# Altium PCB PCB_RLC_LPF.PcbDoc
Units mm, origin at the board's own origin, x right, y up, seen from the top; angles counter-clockwise.
Board outline 180 x 65 mm, 2 copper layers (Top Layer, Bottom Layer); 100 components, 61 nets, 200 pads, 42 vias.
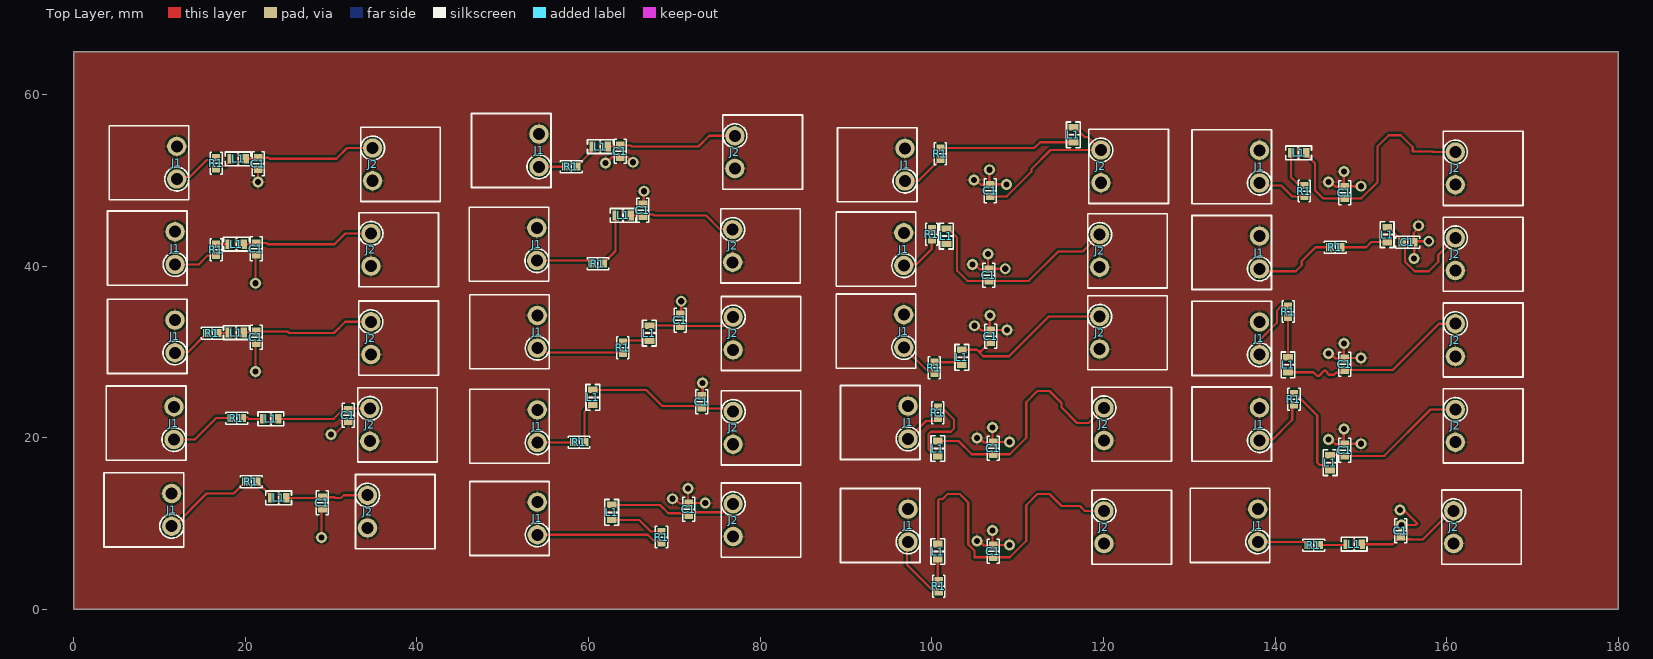
[diagram p0: Top Layer view]
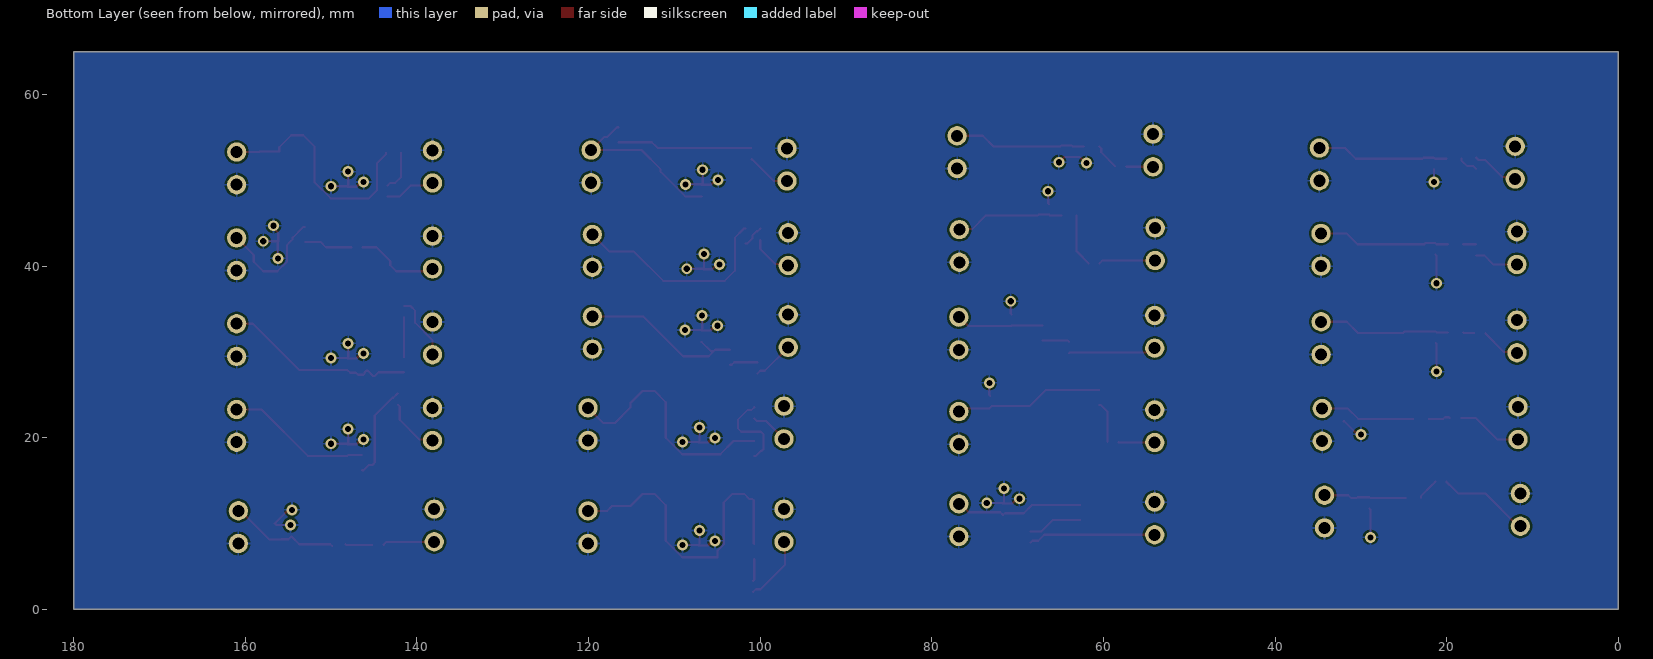
[diagram p1: Bottom Layer view, seen from below]
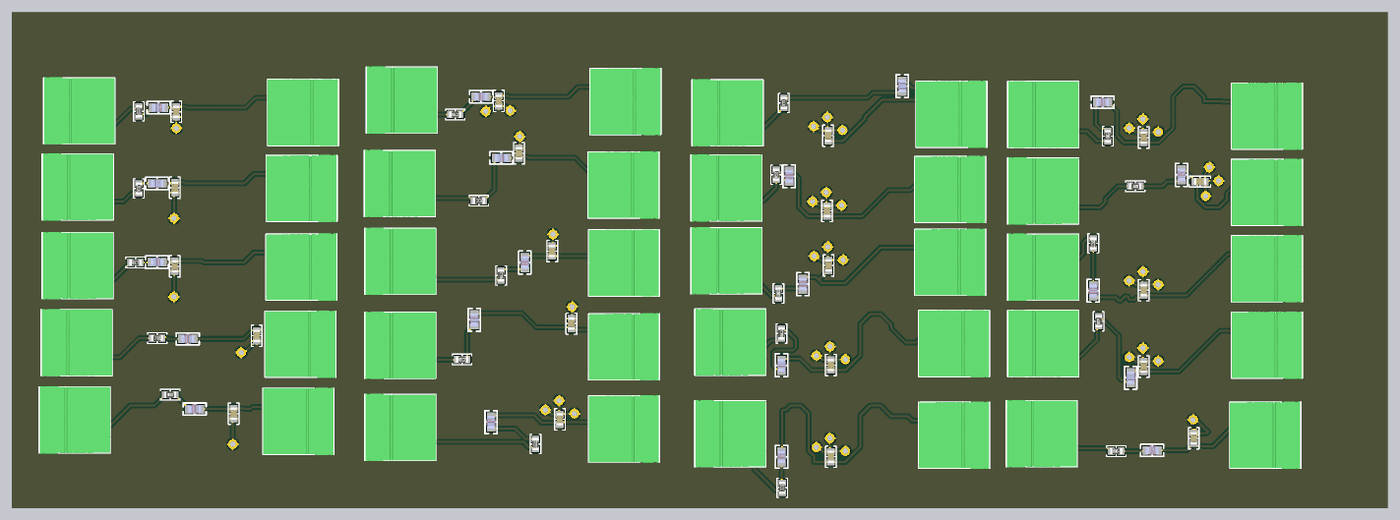
[diagram p2: 3D render of the assembled board from above, using the file's embedded part models]

## Layer stack, top to bottom
Top Solder: solder mask 0.0102, Solder Resist, Dk 3.5
Top Layer: signal copper 0.0356
Dielectric 1: dielectric 0.32, FR-4, Dk 4.8
Bottom Layer: signal copper 0.0356
Bottom Solder: solder mask 0.0102, Solder Resist, Dk 3.5

## Board outline
0,0 180,0 180,65 0,65

## Design rules (kind name [scope] priority, off if disabled: settings)
Clearance [All] p1: gap=0.254 ignorepadtopadclearanceinfootprint=FALSE except(0: Arc-Hole Track-Hole SMDPad-Hole THPad-Hole Via-Hole Fill-Hole Poly-Hole Region-Hole Text-Hole)
PolygonConnect [All] p1: connectstyle=Relief reliefconductorwidth=0.254 reliefentries=4 polygonreliefangle="90 Angle" airgapwidth=0.254
RoutingVias [All] p1: holewidth=0.711 width=1.27 viastyle="Through Hole" minholewidth=0.711 minwidth=1.27 maxholewidth=0.711 maxwidth=1.27
SolderMaskExpansion [All] p1: expansion=0.102 istentingtop=FALSE
Width [All] p1: maxlimit=0.254 minlimit=0.254 preferedwidth=0.254
30 further rules are at their usual default settings.

## Classes and differential pairs
channel class PCB_RLC_LPF: Filter1 Filter2 Filter3 Filter4 Filter5 Filter6 Filter7 Filter8 Filter9 Filter10 Filter11 Filter12 Filter13 Filter14 Filter15 Filter16 Filter17 Filter18 Filter19 Filter20
component class Filter18: C1_Filter18 J1_Filter18
component class Filter16: C1_Filter16 J1_Filter16
component class Filter15: J1_Filter15
component class Filter14: C1_Filter14
component class Filter13: J1_Filter13
component class Filter12: J1_Filter12
component class Filter11: C1_Filter11
component class Filter10: C1_Filter10 J1_Filter10 J2_Filter10
component class Filter9: C1_Filter9 J1_Filter9
component class Filter7: C1_Filter7
component class Filter6: C1_Filter6 J2_Filter6
component class Filter4: J2_Filter4
component class Filter2: C1_Filter2 J1_Filter2

## Components (designator, comment, footprint, x,y, rotation, side; value= is the part's Value field where it differs from the comment)
C1 "" "CAP 0603_1608" 21.5,51.95 r90 top value="10 µF"
C1 "" "CAP 0603_1608" 21.305,42.002 r90 top value="10 µF"
C1 "" "CAP 0603_1608" 21.293,31.706 r90 top value="10 µF"
C1 "" "CAP 0603_1608" 32,22.6 r90 top value="10 µF"
C1 "" "CAP 0603_1608" 29.005,12.402 r90 top value="10 µF"
C1 "" "CAP 0603_1608" 63.705,53.375 r90 top value="10 µF"
C1 "" "CAP 0603_1608" 66.345,46.517 r270 top value="10 µF"
C1 "" "CAP 0603_1608" 70.7,33.7 r270 top value="10 µF"
C1 "" "CAP 0603_1608" 73.2,24.2 r270 top value="10 µF"
C1 "" "CAP 0603_1608" 71.7,11.667 r270 top value="10 µF"
C1 "" "CAP 0603_1608" 106.8,48.8 r270 top value="10 µF"
C1 "" "CAP 0603_1608" 106.658,38.958 r270 top value="10 µF"
C1 "" "CAP 0603_1608" 106.858,31.816 r270 top value="10 µF"
C1 "" "CAP 0603_1608" 107.158,18.764 r270 top value="10 µF"
C1 "" "CAP 0603_1608" 107.158,6.764 r270 top value="10 µF"
C1 "" "CAP 0603_1608" 148.1,48.569 r270 top value="10 µF"
C1 "" "CAP 0603_1608" 155.469,42.8 r180 top value="10 µF"
C1 "" "CAP 0603_1608" 148.1,28.569 r270 top value="10 µF"
C1 "" "CAP 0603_1608" 148.1,18.569 r270 top value="10 µF"
C1 "" "CAP 0603_1608" 154.65,9.175 r270 top value="10 µF"
J1 "" "FCI 06-381-2PIN" 8.726,52.049 r90 top
J1 "" "FCI 06-381-2PIN" 8.531,42.101 r90 top
J1 "" "FCI 06-381-2PIN" 8.519,31.805 r90 top
J1 "" "FCI 06-381-2PIN" 8.394,21.705 r90 top
J1 "" "FCI 06-381-2PIN" 8.131,11.601 r90 top
J1 "" "FCI 06-381-2PIN" 50.931,53.474 r90 top
J1 "" "FCI 06-381-2PIN" 50.676,42.549 r90 top
J1 "" "FCI 06-381-2PIN" 50.731,32.349 r90 top
J1 "" "FCI 06-381-2PIN" 50.731,21.349 r90 top
J1 "" "FCI 06-381-2PIN" 50.731,10.599 r90 top
J1 "" "FCI 06-381-2PIN" 93.573,51.816 r90 top
J1 "" "FCI 06-381-2PIN" 93.431,41.974 r90 top
J1 "" "FCI 06-381-2PIN" 93.431,32.432 r90 top
J1 "" "FCI 06-381-2PIN" 93.931,21.78 r90 top
J1 "" "FCI 06-381-2PIN" 93.931,9.78 r90 top
J1 "" "FCI 06-381-2PIN" 134.873,51.585 r90 top
J1 "" "FCI 06-381-2PIN" 134.873,41.585 r90 top
J1 "" "FCI 06-381-2PIN" 134.873,31.585 r90 top
J1 "" "FCI 06-381-2PIN" 134.873,21.585 r90 top
J1 "" "FCI 06-381-2PIN" 134.673,9.785 r90 top
J2 "" "FCI 06-381-2PIN" 38.15,51.85 r270 top
J2 "" "FCI 06-381-2PIN" 37.955,41.902 r270 top
J2 "" "FCI 06-381-2PIN" 37.943,31.606 r270 top
J2 "" "FCI 06-381-2PIN" 37.818,21.506 r270 top
J2 "" "FCI 06-381-2PIN" 37.555,11.402 r270 top
J2 "" "FCI 06-381-2PIN" 80.355,53.275 r270 top
J2 "" "FCI 06-381-2PIN" 80.1,42.35 r270 top
J2 "" "FCI 06-381-2PIN" 80.155,32.15 r270 top
J2 "" "FCI 06-381-2PIN" 80.155,21.15 r270 top
J2 "" "FCI 06-381-2PIN" 80.155,10.4 r270 top
J2 "" "FCI 06-381-2PIN" 122.997,51.617 r270 top
J2 "" "FCI 06-381-2PIN" 122.855,41.775 r270 top
J2 "" "FCI 06-381-2PIN" 122.855,32.233 r270 top
J2 "" "FCI 06-381-2PIN" 123.355,21.581 r270 top
J2 "" "FCI 06-381-2PIN" 123.355,9.581 r270 top
J2 "" "FCI 06-381-2PIN" 164.297,51.386 r270 top
J2 "" "FCI 06-381-2PIN" 164.297,41.386 r270 top
J2 "" "FCI 06-381-2PIN" 164.297,31.386 r270 top
J2 "" "FCI 06-381-2PIN" 164.297,21.386 r270 top
J2 "" "FCI 06-381-2PIN" 164.097,9.586 r270 top
L1 "" "IND 0603_1608 RF WW" 19.175,52.5 r180 top value=47µH
L1 "" "IND 0603_1608 RF WW" 18.98,42.552 r180 top value=47µH
L1 "" "IND 0603_1608 RF WW" 18.968,32.256 r180 top value=47µH
L1 "" "IND 0603_1608 RF WW" 23,22.2 r180 top value=47µH
L1 "" "IND 0603_1608 RF WW" 23.9,13 r180 top value=47µH
L1 "" "IND 0603_1608 RF WW" 61.38,53.925 r180 top value=47µH
L1 "" "IND 0603_1608 RF WW" 64.025,45.9 r180 top value=47µH
L1 "" "IND 0603_1608 RF WW" 67.1,32.2 r270 top value=47µH
L1 "" "IND 0603_1608 RF WW" 60.5,24.7 r270 top value=47µH
L1 "" "IND 0603_1608 RF WW" 62.7,11.3 r270 top value=47µH
L1 "" "IND 0603_1608 RF WW" 116.5,55.3 r270 top value=47µH
L1 "" "IND 0603_1608 RF WW" 101.7,43.5 r270 top value=47µH
L1 "" "IND 0603_1608 RF WW" 103.5,29.375 r270 top value=47µH
L1 "" "IND 0603_1608 RF WW" 100.7,18.748 r270 top value=47µH
L1 "" "IND 0603_1608 RF WW" 100.7,6.748 r270 top value=47µH
L1 "" "IND 0603_1608 RF WW" 142.725,53.2 r180 top value=47µH
L1 "" "IND 0603_1608 RF WW" 153.047,43.675 r270 top value=47µH
L1 "" "IND 0603_1608 RF WW" 141.5,28.5 r90 top value=47µH
L1 "" "IND 0603_1608 RF WW" 146.4,17.1 r270 top value=47µH
L1 "" "IND 0603_1608 RF WW" 149.2,7.6 r180 top value=47µH
R1 "" "RES 0603_1608" 144.5,7.5 r0 top value="560 Ohms"
R1 "" "RES 0603_1608" 142.196,24.503 r90 top value="560 Ohms"
R1 "" "RES 0603_1608" 141.5,34.7 r270 top value="560 Ohms"
R1 "" "RES 0603_1608" 147,42.2 r0 top value="560 Ohms"
R1 "" "RES 0603_1608" 143.4,48.75 r90 top value="560 Ohms"
R1 "" "RES 0603_1608" 100.8,2.7 r90 top value="560 Ohms"
R1 "" "RES 0603_1608" 100.7,22.9 r90 top value="560 Ohms"
R1 "" "RES 0603_1608" 100.3,28.15 r90 top value="560 Ohms"
R1 "" "RES 0603_1608" 100,43.7 r90 top value="560 Ohms"
R1 "" "RES 0603_1608" 101,53.1 r90 top value="560 Ohms"
R1 "" "RES 0603_1608" 68.504,8.43 r90 top value="560 Ohms"
R1 "" "RES 0603_1608" 58.9,19.5 r0 top value="560 Ohms"
R1 "" "RES 0603_1608" 64,30.5 r90 top value="560 Ohms"
R1 "" "RES 0603_1608" 61.1,40.3 r0 top value="560 Ohms"
R1 "" "RES 0603_1608" 58,51.6 r0 top value="560 Ohms"
R1 "" "RES 0603_1608" 20.7,14.9 r0 top value="560 Ohms"
R1 "" "RES 0603_1608" 19,22.3 r0 top value="560 Ohms"
R1 "" "RES 0603_1608" 16.15,32.2 r0 top value="560 Ohms"
R1 "" "RES 0603_1608" 16.6,41.9 r90 top value="560 Ohms"
R1 "" "RES 0603_1608" 16.6,52 r270 top value="560 Ohms"

## Footprints (in the part's own frame and the unit in brackets; to place one, negate y for a bottom-side part, rotate by r counter-clockwise, add the part's x,y. Pads: shape width x height; smd on the part's side, far side on the other; paste and mask are expansions set on the pad)
"CAP 0603_1608" [mm] "Chip Capacitor, 2-Leads, Body 1.60x0.80mm, IPC Medium Density"
  rect 0.9x1 smd: 1(-0.675,0) 2(0.675,0)
  silkscreen extent -1.4,-0.7 1.4,0.7, body extent -0.8,-0.41 0.8,0.41, height 0.82
"FCI 06-381-2PIN" [mm] "FCI Pluggable Terminal Block"
  round 2.25 hole 1.4: 1(-1.905,-3.302) 2(1.905,-3.302)
  silkscreen extent -4.32,-4.7 4.32,4.57, body extent -4.4,-4.7 4.4,4.5, height 7.6
"IND 0603_1608 RF WW" [mm] "Chip Inductor, 2-Leads, Body 1.65x0.99mm, IPC Medium Density"
  rect 0.76x1.13 smd: 1(-0.875,0) 2(0.875,0)
  silkscreen extent -1.5,-0.8 1.5,0.8, body extent -0.84,-0.58 0.83,0.58, height 1
"RES 0603_1608" [mm] "Chip Resistor, 2-Leads, Body 1.60x0.80mm, IPC Medium Density"
  rect 0.85x0.95 smd: 1(-0.65,0) 2(0.65,0)
  silkscreen extent -1.27,-0.7 1.27,0.7, body extent -0.8,-0.4 0.8,0.4, height 0.45

## Part data
C1 C1 C1 C1 C1 C1 C1 C1 C1 C1 C1 C1 C1 C1 C1 C1 C1 C1 C1 C1: library part MD0603BW106M100NHT-EM, "CAP CER 10UF 10V X5R 0603", Capacitance="10 µF", Device Package="0603 (1608 Metric)", manufacturer="Knowles Novacap", Operating Temperature="-55°C ~ 85°C", Supplier Part Number 1=1763-MD0603BW106M100NHT-EMCT-ND, Temperature Coefficient=X5R, Tolerance=±20%, Voltage - Rated=10V, Applications="Medical, Non-Critical", componentlink1description=Datasheet, componentlink1url="https://mm.digikey.com/Volume0/opasdata/d220001/medias/docus/5546/MD Series R3.pdf", componentlink2description="DigiKey Link", componentlink2url=https://www.digikey.com/en/products/detail/knowles-novacap/MD0603BW106M100NHT-EM/21406876, lastupdated="02/11/2023 19:09:18", Lifecycle Status=Active, Minimum Order=1, Mounting Type="Surface Mount, MLCC", Package / Case="0603 (1608 Metric)", packaging=TapeAndReel, Part Number=MD0603BW106M100NHT-EM, partid=56748, price=0.24, series=MD, Supplier 1=DigiKey
J1 J1 J1 J1 J1 J1 J1 J1 J1 J1 J1 J1 J1 J1 J1 J1 J1 J1 J1 J1 J2 J2 J2 J2 J2 J2 J2 J2 J2 J2 J2 J2 J2 J2 J2 J2 J2 J2 J2 J2: library part OQ0232510000G, "TERM BLOCK HDR 2POS 90DEG 3.81MM", Color=Green, Current - UL=10A, manufacturer="Amphenol Anytek", Operating Temperature="-40°C ~ 115°C", Supplier Part Number 1=609-3819-ND, Voltage - UL=300V, componentlink1description=Datasheet, componentlink1url=http://portal.fciconnect.com/Comergent//fci/drawing/oqxx32x100j0g.pdf, componentlink2description="DigiKey Link", componentlink2url=//digikey.com/product-detail/en/amphenol-anytek/OQ0232510000G/609-3819-ND/2261255, Contact Mating Finish=Tin, Header Orientation="90°, Right Angle", lastupdated="16/12/2019 19:14:30", Lifecycle Status=0, Minimum Order=1, Mounting Type="Through Hole", Number of Levels=1, Number of Positions=2, packaging=Bulk, Part Number=OQ0232510000G, Part Status=Active, Pitch="0.150\" (3.81mm)", Positions Per Level=2, price=0.49, series=06-381, Supplier 1=DigiKey, Termination Style=Solder, Type="Header, Male Pins, Shrouded (4 Side)"
L1 L1 L1 L1 L1 L1 L1 L1 L1 L1 L1 L1 L1 L1 L1 L1 L1 L1 L1 L1: library part L0603B470MPWFT, "INDUCTORPOWER LINE 0603 47H 20%", Current Rating (Amps)=90mA, DC Resistance (DCR)=5.8Ohm, Device Package="0603 (1608 Metric)", Frequency - Self Resonant=11MHz, Inductance=47µH, Inductance Frequency - Test=2.52MHz, manufacturer=KEMET, Operating Temperature="-40°C ~ 105°C", Supplier Part Number 1=399-17776-1-ND, Tolerance=±20%, componentlink1description=Datasheet, componentlink1url=https://api.kemet.com/component-edge/download/datasheet/L0603B470MPWFT.pdf, componentlink2description="DigiKey Link", componentlink2url=http://digikey.com/product-detail/en/kemet/L0603B470MPWFT/399-17776-1-ND/8601439, Height - Seated (Max)="0.035\" (0.90mm)", lastupdated="06/09/2020 11:05:20", Lifecycle Status=Active, Material - Core=Ferrite, Minimum Order=1, Mounting Type="Surface Mount", Package / Case="0603 (1608 Metric)", packaging=TapeAndReel, Part Number=L0603B470MPWFT, Part Status=Active, partid=1309, price=0.14, series=L-PWF, Shielding=Unshielded, Size / Dimension="0.063\" L x 0.031\" W (1.60mm x 0.80mm)", Supplier 1=DigiKey, Supplier Device Package="0603 (1608 Metric)", Type=Wirewound
R1 R1 R1 R1 R1 R1 R1 R1 R1 R1 R1 R1 R1 R1 R1 R1 R1 R1 R1 R1: library part CRGP0603F560R, "RES 560 OHM 1% 1/4W 0603", Device Package="0603 (1608 Metric)", manufacturer="TE Connectivity Passive Product", Operating Temperature="-55°C ~ 155°C", Power (Watts)="0.25W, 1/4W", Resistance="560 Ohms", Supplier Device Package=0603, Supplier Part Number 1=A130413CT-ND, Temperature Coefficient=±100ppm/°C, Tolerance=±1%, componentlink1description=Datasheet, componentlink1url=https://www.te.com/commerce/DocumentDelivery/DDEController?Action=srchrtrv&DocNm=9-1773463-9&DocType=DS&DocLang=English, componentlink2description="DigiKey Link", componentlink2url=https://www.digikey.com/en/products/detail/te-connectivity-passive-product/CRGP0603F560R/8577015, Composition="Thick Film", Features="Pulse Withstanding", Height - Seated (Max)="0.022\" (0.55mm)", lastupdated="02/11/2023 19:45:35", Lifecycle Status=Active, Minimum Order=1, Number of Terminations=2, Package / Case="0603 (1608 Metric)", packaging=TapeAndReel, Part Number=CRGP0603F560R, Part Status=Active, partid=4997, price=0.02, series=CRGP, Size / Dimension="0.063\" L x 0.031\" W (1.60mm x 0.80mm)", Supplier 1=DigiKey

## Via types
v1: diameter 1.27, hole 0.711, Top Layer to Bottom Layer, 42 vias

## Nets (pads, with @x,y where several pads share a name; then routed paths per layer and width w, separated by ;. In a path a pad name is that pad's centre, name@x,y a point inside that pad or via, vN(x,y) a via of type N, cw(c..) or ccw(c..) an arc to the next point about the centre after c; other vN are vias at no path point)
GND: C1.1 J1.2 J2.2 | length 86.6
  Top Layer w0.254: v1(21.188,27.704) 21.188,30.926 C1.1@21.293,31.031 ; v1(21.2,38) 21.2,41.222 C1.1@21.305,41.327 ; v1(21.5,49.8) C1.1@21.5,51.275 ; v1(28.9,8.4) 28.9,11.622 C1.1@29.005,11.727 ; v1(30,20.4) 30.194,20.594 30.619,20.594 31.95,21.925 C1.1@32,21.925 ; v1(62,52) 62.037,52 62.737,52.7 63.705,52.7 64.586,52.7 65.186,52.1 v1(65.2,52.1) ; C1.1@66.345,47.192 66.445,47.292 v1(66.445,48.717) ; v1(69.8,12.898) 70.075,12.898 70.631,12.342 C1.1@71.7,12.342 ; C1.1@70.7,34.375 70.8,34.475 v1(70.8,35.9) ; v1(71.6,14.098) 71.6,12.442 C1.1@71.7,12.342 ; C1.1@73.2,24.875 73.3,24.975 v1(73.3,26.4) ; v1(73.6,12.398) 71.756,12.398 C1.1@71.7,12.342 ; v1(104.758,40.189) 105.033,40.189 105.589,39.633 C1.1@106.658,39.633 ; v1(104.9,50.031) 105.175,50.031 105.731,49.475 C1.1@106.8,49.475 ; v1(104.958,33.047) 105.233,33.047 105.789,32.491 C1.1@106.858,32.491 ; v1(105.258,7.995) 105.533,7.995 106.089,7.439 C1.1@107.158,7.439 ; v1(105.258,19.995) 105.533,19.995 106.089,19.439 C1.1@107.158,19.439 ; C1.1@106.558,39.633 C1.1@106.658,39.633 ; v1(106.558,41.389) 106.558,39.733 C1.1@106.658,39.633 ; C1.1@106.7,49.475 C1.1@106.8,49.475 ; v1(106.7,51.231) 106.7,49.575 C1.1@106.8,49.475 ; C1.1@106.758,32.491 C1.1@106.858,32.491 ; v1(106.758,34.247) 106.758,32.591 C1.1@106.858,32.491 ; C1.1@107.058,7.439 C1.1@107.158,7.439 ; v1(107.058,9.195) 107.058,7.539 C1.1@107.158,7.439 ; C1.1@107.058,19.439 C1.1@107.158,19.439 ; v1(107.058,21.195) 107.058,19.539 C1.1@107.158,19.439 ; v1(108.558,39.689) 106.714,39.689 C1.1@106.658,39.633 ; v1(108.7,49.531) 106.856,49.531 C1.1@106.8,49.475 ; v1(108.758,32.547) 106.914,32.547 C1.1@106.858,32.491 ; v1(109.058,7.495) 107.214,7.495 C1.1@107.158,7.439 ; v1(109.058,19.495) 107.214,19.495 C1.1@107.158,19.439 ; v1(146.2,19.8) 146.475,19.8 147.031,19.244 C1.1@148.1,19.244 ; v1(146.2,29.8) 146.475,29.8 147.031,29.244 C1.1@148.1,29.244 ; v1(146.2,49.8) 146.475,49.8 147.031,49.244 C1.1@148.1,49.244 ; C1.1@148,19.244 C1.1@148.1,19.244 ; v1(148,21) 148,19.344 C1.1@148.1,19.244 ; C1.1@148,29.244 C1.1@148.1,29.244 ; v1(148,31) 148,29.344 C1.1@148.1,29.244 ; C1.1@148,49.244 C1.1@148.1,49.244 ; v1(148,51) 148,49.344 C1.1@148.1,49.244 ; v1(150,19.3) 148.156,19.3 C1.1@148.1,19.244 ; v1(150,29.3) 148.156,29.3 C1.1@148.1,29.244 ; v1(150,49.3) 148.156,49.3 C1.1@148.1,49.244 ; v1(154.55,11.606) 154.744,11.412 155.15,11.412 156.549,10.013 156.375,9.839 v1(154.731,9.839) ; C1.1@156.144,42.9 C1.1@156.144,42.8 ; v1(156.2,40.9) 156.2,42.744 C1.1@156.144,42.8 ; v1(156.7,44.7) 156.7,44.425 156.144,43.869 C1.1@156.144,42.8 ; v1(157.9,42.9) 156.244,42.9 C1.1@156.144,42.8
IN_Filter1: J1.1@12.028,50.144 R1.1@16.6,52.65 | length 5.6
  Top Layer w0.254: J1.1@12.028,50.144 12.256,50.372 13.534,50.372 15.514,52.352 16.302,52.352 R1.1@16.6,52.65
IN_Filter2: J1.1@11.833,40.196 R1.1@16.6,41.25 | length 5.2
  Top Layer w0.254: J1.1@11.833,40.196 14.596,40.196 15.65,41.25 R1.1@16.6,41.25
IN_Filter3: J1.1@11.821,29.9 R1.1@15.5,32.2 | length 4.7
  Top Layer w0.254: J1.1@11.821,29.9 11.898,29.977 13.327,29.977 15.5,32.15 R1.1@15.5,32.2
IN_Filter4: J1.1@11.696,19.8 R1.1@18.35,22.3 | length 7.7
  Top Layer w0.254: J1.1@11.696,19.8 14.125,19.8 16.625,22.3 R1.1@18.35,22.3
IN_Filter5: J1.1@11.433,9.696 R1.1@20.05,14.9 | length 10.8
  Top Layer w0.254: J1.1@11.433,9.696 11.696,9.696 15.5,13.5 18.65,13.5 19.702,14.552 19.752,14.552 20.05,14.85 R1.1@20.05,14.9
IN_Filter6: J1.1@54.233,51.569 R1.1@57.35,51.6 | length 3.1
  Top Layer w0.254: J1.1@54.233,51.569 57.319,51.569 R1.1@57.35,51.6
IN_Filter7: J1.1@53.978,40.644 R1.1@60.45,40.3 | length 6.6
  Top Layer w0.254: J1.1@53.978,40.644 60.152,40.644 60.45,40.346 R1.1@60.45,40.3
IN_Filter8: J1.1@54.033,30.444 R1.1@64,29.85 | length 10.2
  Top Layer w0.254: J1.1@54.033,30.444 54.573,30.444 55.081,29.936 63.914,29.936 R1.1@64,29.85
IN_Filter9: J1.1@54.033,19.444 R1.1@58.25,19.5 | length 4.2
  Top Layer w0.254: J1.1@54.033,19.444 58.194,19.444 R1.1@58.25,19.5
IN_Filter10: J1.1@54.033,8.694 R1.1@68.504,7.78 | length 14.9
  Top Layer w0.254: J1.1@54.033,8.694 66.906,8.694 67.6,8 68.284,8 R1.1@68.504,7.78
IN_Filter11: J1.1@96.875,49.911 R1.1@101,52.45 | length 5.2
  Top Layer w0.254: J1.1@96.875,49.911 98.411,49.911 100.95,52.45 R1.1@101,52.45
IN_Filter12: J1.1@96.733,40.069 R1.1@100,43.05 | length 5.1
  Top Layer w0.254: J1.1@96.733,40.069 96.903,40.239 98.239,40.239 100,42 R1.1@100,43.05
IN_Filter13: J1.1@96.733,30.527 R1.1@100.3,27.5 | length 4.8
  Top Layer w0.254: J1.1@96.733,30.527 99.462,27.798 100.002,27.798 R1.1@100.3,27.5
IN_Filter14: J1.1@97.233,19.875 R1.1@100.7,22.25 | length 4.5
  Top Layer w0.254: J1.1@97.233,19.875 99.31,21.952 100.402,21.952 R1.1@100.7,22.25
IN_Filter15: J1.1@97.233,7.875 R1.1@100.8,2.05 | length 7.7
  Top Layer w0.254: J1.1@97.233,7.875 97.1,7.742 97.1,5.2 99.952,2.348 100.502,2.348 R1.1@100.8,2.05
IN_Filter16: J1.1@138.175,49.68 R1.1@143.4,48.1 | length 5.9
  Top Layer w0.254: J1.1@138.175,49.68 138.455,49.4 140.7,49.4 142,48.1 R1.1@143.4,48.1
IN_Filter17: J1.1@138.175,39.68 R1.1@146.35,42.2 | length 9.7
  Top Layer w0.254: J1.1@138.175,39.68 138.455,39.4 142.4,39.4 143.1,40.1 143.1,40.6 144.7,42.2 R1.1@146.35,42.2
IN_Filter18: J1.1@138.175,29.68 R1.1@141.5,35.35 | length 7.5
  Top Layer w0.254: J1.1@138.175,29.68 138.175,31.36 140.2,33.385 140.2,34.8 140.75,35.35 R1.1@141.5,35.35
IN_Filter19: J1.1@138.175,19.68 R1.1@142.196,23.853 | length 6.7
  Top Layer w0.254: J1.1@138.175,19.68 138.276,19.781 139.681,19.781 142,22.1 142,23.657 R1.1@142.196,23.853
IN_Filter20: J1.1@137.975,7.88 R1.1@143.85,7.5 | length 6.1
  Top Layer w0.254: J1.1@137.975,7.88 138.007,7.848 143.552,7.848 143.85,7.55 R1.1@143.85,7.5
NetL1_Filter1_2: L1.2@18.3,52.5 R1.2@16.6,51.35 | length 2.3
  Top Layer w0.254: R1.2@16.6,51.35 16.898,51.648 17.633,51.648 18.3,52.315 L1.2@18.3,52.5
NetL1_Filter2_2: L1.2@18.105,42.552 R1.2@16.6,42.55 | length 1.5
  Top Layer w0.254: R1.2@16.6,42.55 16.602,42.552 L1.2@18.105,42.552
NetL1_Filter3_2: L1.2@18.093,32.256 R1.2@16.8,32.2 | length 1.3
  Top Layer w0.254: R1.2@16.8,32.2 18.037,32.2 L1.2@18.093,32.256
NetL1_Filter4_2: L1.2@22.125,22.2 R1.2@19.65,22.3 | length 2.6
  Top Layer w0.254: R1.2@19.65,22.3 19.75,22.4 20.2,22.4 20.4,22.2 L1.2@22.125,22.2
NetL1_Filter5_2: L1.2@23.025,13 R1.2@21.35,14.9 | length 2.6
  Top Layer w0.254: R1.2@21.35,14.9 21.35,14.85 21.648,14.552 21.658,14.552 23.025,13.185 L1.2@23.025,13
NetL1_Filter6_2: L1.2@60.505,53.925 R1.2@58.65,51.6 | length 3.1
  Top Layer w0.254: R1.2@58.65,51.6 58.65,51.65 60.252,53.252 60.252,53.672 L1.2@60.505,53.925
NetL1_Filter7_2: L1.2@63.15,45.9 R1.2@61.75,40.3 | length 6.2
  Top Layer w0.254: R1.2@61.75,40.3 61.75,40.35 63.15,41.75 L1.2@63.15,45.9
NetL1_Filter8_2: L1.2@67.1,31.325 R1.2@64,31.15 | length 3.2
  Top Layer w0.254: R1.2@64,31.15 64.175,31.325 L1.2@67.1,31.325
NetL1_Filter9_2: L1.2@60.5,23.825 R1.2@59.55,19.5 | length 4.8
  Top Layer w0.254: R1.2@59.55,19.5 59.55,23.06 60.315,23.825 L1.2@60.5,23.825
NetL1_Filter10_2: L1.2@62.7,10.425 R1.2@68.504,9.08 | length 6.4
  Top Layer w0.254: L1.2@62.7,10.425 65.893,10.425 67.239,9.08 R1.2@68.504,9.08
NetL1_Filter11_2: L1.2@116.5,54.425 R1.2@101,53.75 | length 15.8
  Top Layer w0.254: R1.2@101,53.75 111.95,53.75 112.625,54.425 L1.2@116.5,54.425
NetL1_Filter12_2: L1.2@101.7,42.625 R1.2@100,44.35 | length 2.6
  Top Layer w0.254: R1.2@100,44.35 100.298,44.052 100.437,44.052 100.903,43.586 100.903,43.237 101.515,42.625 L1.2@101.7,42.625
NetL1_Filter13_2: L1.2@103.5,28.5 R1.2@100.3,28.8 | length 3.3
  Top Layer w0.254: R1.2@100.3,28.8 103.015,28.8 103.315,28.5 L1.2@103.5,28.5
NetL1_Filter14_2: L1.2@100.7,17.873 R1.2@100.7,23.55 | length 9.9
  Top Layer w0.254: L1.2@100.7,17.873 100.515,17.873 99.903,18.485 99.815,18.485 99.6,18.7 99.6,20.4 99.9,20.7 102.2,20.7 102.6,21.1 102.6,22.1 101.448,23.252 100.998,23.252 R1.2@100.7,23.55
NetL1_Filter15_2: L1.2@100.7,5.873 R1.2@100.8,3.35 | length 2.6
  Top Layer w0.254: L1.2@100.7,5.873 100.7,3.45 R1.2@100.8,3.35
NetL1_Filter16_2: L1.2@141.85,53.2 R1.2@143.4,49.4 | length 4.8
  Top Layer w0.254: L1.2@141.85,53.2 141.85,50.35 142.502,49.698 143.102,49.698 R1.2@143.4,49.4
NetL1_Filter17_2: L1.2@153.047,42.8 R1.2@147.65,42.2 | length 5.6
  Top Layer w0.254: R1.2@147.65,42.2 150.6,42.2 151.2,42.8 L1.2@153.047,42.8
NetL1_Filter18_2: L1.2@141.5,29.375 R1.2@141.5,34.05 | length 4.7
  Top Layer w0.254: L1.2@141.5,29.375 R1.2@141.5,34.05
NetL1_Filter19_2: L1.2@146.4,16.225 R1.2@142.196,25.153 | length 11.1
  Top Layer w0.254: R1.2@142.196,25.153 142.246,25.153 142.74,24.659 142.829,24.659 144.9,22.588 144.9,17.1 145.163,16.837 145.603,16.837 146.215,16.225 L1.2@146.4,16.225
NetL1_Filter20_2: L1.2@148.325,7.6 R1.2@145.15,7.5 | length 3.2
  Top Layer w0.254: R1.2@145.15,7.5 148.225,7.5 L1.2@148.325,7.6
OUT_Filter1: C1.2@21.5,52.625 J2.1@34.848,53.755 L1.1@20.05,52.5 | length 15.4
  Top Layer w0.254: L1.1@20.05,52.5 21.375,52.5 21.5,52.625 22.7,52.625 22.825,52.5 30.6,52.5 31.855,53.755 J2.1@34.848,53.755
OUT_Filter2: C1.2@21.305,42.677 J2.1@34.653,43.807 L1.1@19.855,42.552 | length 15.4
  Top Layer w0.254: L1.1@19.855,42.552 21.18,42.552 21.305,42.677 22.505,42.677 22.63,42.552 30.405,42.552 31.66,43.807 J2.1@34.653,43.807
OUT_Filter3: C1.2@21.293,32.381 J2.1@34.641,33.511 L1.1@19.843,32.256 | length 15.5
  Top Layer w0.254: L1.1@19.843,32.256 21.168,32.256 21.293,32.381 24.919,32.381 25.1,32.2 30.337,32.2 31.648,33.511 J2.1@34.641,33.511
OUT_Filter4: C1.2@32,23.275 J2.1@34.516,23.411 L1.1@23.875,22.2 | length 11.1
  Top Layer w0.254: L1.1@23.875,22.2 30.312,22.2 31.523,23.411 J2.1@34.516,23.411
OUT_Filter5: C1.2@29.005,13.077 J2.1@34.253,13.307 L1.1@24.775,13 | length 9.7
  Top Layer w0.254: L1.1@24.775,13 28.928,13 29.005,13.077 30.423,13.077 30.5,13 31.175,13 31.482,13.307 J2.1@34.253,13.307
OUT_Filter6: C1.2@63.705,54.05 J2.1@77.053,55.18 L1.1@62.255,53.925 | length 15.4
  Top Layer w0.254: L1.1@62.255,53.925 63.58,53.925 63.705,54.05 64.905,54.05 65.03,53.925 72.805,53.925 74.06,55.18 J2.1@77.053,55.18
OUT_Filter7: C1.2@66.345,45.842 J2.1@76.798,44.255 L1.1@64.9,45.9 | length 12.7
  Top Layer w0.254: L1.1@64.9,45.9 66.225,45.9 66.35,46.025 67.55,46.025 67.675,45.9 73.7,45.9 75.292,44.308 76.745,44.308 J2.1@76.798,44.255
OUT_Filter8: C1.2@70.7,33.025 J2.1@76.853,34.055 L1.1@67.1,33.075 | length 10.2
  Top Layer w0.254: L1.1@67.1,33.075 70.65,33.075 70.7,33.025 75.753,33.025 76.783,34.055 J2.1@76.853,34.055
OUT_Filter9: C1.2@73.2,23.525 J2.1@76.853,23.055 L1.1@60.5,25.575 | length 17.4
  Top Layer w0.254: L1.1@60.5,25.575 66.725,25.575 68.6,23.7 73.025,23.7 73.2,23.525 73.325,23.4 76.508,23.4 J2.1@76.853,23.055
OUT_Filter10: C1.2@71.7,10.992 J2.1@76.853,12.305 L1.1@62.7,12.175 | length 15.2
  Top Layer w0.254: L1.1@62.7,12.175 68.325,12.175 69.3,11.2 71.492,11.2 71.7,10.992 72.023,11.315 75.713,11.315 76.703,12.305 J2.1@76.853,12.305
OUT_Filter11: C1.2@106.8,48.125 J2.1@119.695,53.522 L1.1@116.5,56.175 | length 19.6
  Top Layer w0.254: C1.2@106.8,48.125 108.731,48.125 111.6,50.994 111.6,51.3 113.822,53.522 119.695,53.522 118.169,55.048 117.812,55.048 116.685,56.175 L1.1@116.5,56.175
OUT_Filter12: C1.2@106.658,38.283 J2.1@119.553,43.68 L1.1@101.7,44.375 | length 24.9
  Top Layer w0.254: L1.1@101.7,44.375 101.885,44.375 102.948,43.312 102.948,39.468 104.133,38.283 106.658,38.283 111.3,38.283 114.717,41.7 117.573,41.7 J2.1@119.553,43.68
OUT_Filter13: C1.2@106.858,31.141 J2.1@119.553,34.138 L1.1@103.5,30.25 | length 20.2
  Top Layer w0.254: L1.1@103.5,30.25 105.25,30.25 105.4,30.1 ; C1.2@106.858,31.141 106.808,31.141 105.767,30.1 105.4,30.1 ; J2.1@119.553,34.138 119.55,34.136 113.636,34.136 109,29.5 106,29.5 105.4,30.1
OUT_Filter14: C1.2@107.158,18.089 J2.1@120.053,23.486 L1.1@100.7,19.623 | length 28
  Top Layer w0.254: L1.1@100.7,19.623 103.099,19.623 104.633,18.089 107.158,18.089 109.089,18.089 111,20 111,24.148 112.3,25.448 113.7,25.448 115.1,24.048 115.1,23.546 116.915,21.731 118.298,21.731 J2.1@120.053,23.486
OUT_Filter15: C1.2@107.158,6.089 J2.1@120.053,11.486 L1.1@100.7,7.623 | length 37.4
  Top Layer w0.254: L1.1@100.7,7.623 100.758,7.681 100.758,12.715 100.907,12.864 101.258,12.864 101.858,13.464 103.226,13.464 104.242,12.448 104.242,7.574 104.958,6.858 104.958,6.089 107.158,6.089 109.089,6.089 111,8 111,12.148 112.3,13.448 113.7,13.448 115.1,12.048 117.256,12.048 117.818,11.486 J2.1@120.053,11.486
OUT_Filter16: C1.2@148.1,47.894 J2.1@160.995,53.291 L1.1@143.6,53.2 | length 28.1
  Top Layer w0.254: L1.1@143.6,53.2 143.6,53.015 144.644,51.971 144.644,48.825 145.575,47.894 148.1,47.894 150.031,47.894 151.942,49.805 151.942,53.953 153.242,55.253 154.642,55.253 156.042,53.853 156.042,53.351 158.338,53.351 158.4,53.289 160.992,53.289 J2.1@160.995,53.291
OUT_Filter17: C1.2@154.794,42.8 J2.1@160.995,43.291 L1.1@153.047,44.55 | length 13.4
  Top Layer w0.254: L1.1@153.047,44.55 153.232,44.55 154.471,43.311 154.471,43.123 154.794,42.8 155.117,42.477 155.117,40.546 156.263,39.4 157.9,39.4 159,40.5 159,41.296 J2.1@160.995,43.291
OUT_Filter18: C1.2@148.1,27.894 J2.1@160.995,33.291 L1.1@141.5,27.625 | length 22.7
  Top Layer w0.254: L1.1@141.5,27.625 144.475,27.625 144.895,27.205 145.105,27.205 145.7,27.8 145.91,27.8 146.1,27.61 146.1,27.449 146.214,27.334 146.852,27.334 147.089,27.571 147.777,27.571 148.1,27.894 153.694,27.894 159.091,33.291 J2.1@160.995,33.291
OUT_Filter19: C1.2@148.1,17.894 J2.1@160.995,23.291 L1.1@146.4,17.975 | length 16.9
  Top Layer w0.254: L1.1@146.4,17.975 148.019,17.975 148.1,17.894 152.706,17.894 158.103,23.291 J2.1@160.995,23.291
OUT_Filter20: C1.2@154.65,8.5 J2.1@160.795,11.491 L1.1@150.075,7.6 | length 12.9
  Top Layer w0.254: L1.1@149.859,7.384 150.075,7.6 153.7,7.6 154.6,8.5 154.65,8.5 154.973,8.177 155.736,8.177 155.753,8.161 157.224,8.161 160.554,11.491 J2.1@160.795,11.491

## Polygon pours and split planes (outlines as drawn)
GND on Bottom Layer "BOT_GND" (solid, pour order 1): 0,0 180,0 180,65 0,65
GND on Top Layer "TOP_GND" (solid, pour order 0): 0,0 180,0 180,65 0,65

## Silkscreen, mask and mechanical layers (free items; w line width, h text height)
Top Overlay:
Mechanical 1:
  the board outline again, w0.254